# EAGLE board SIO2SD (EAGLE 7.2.0)
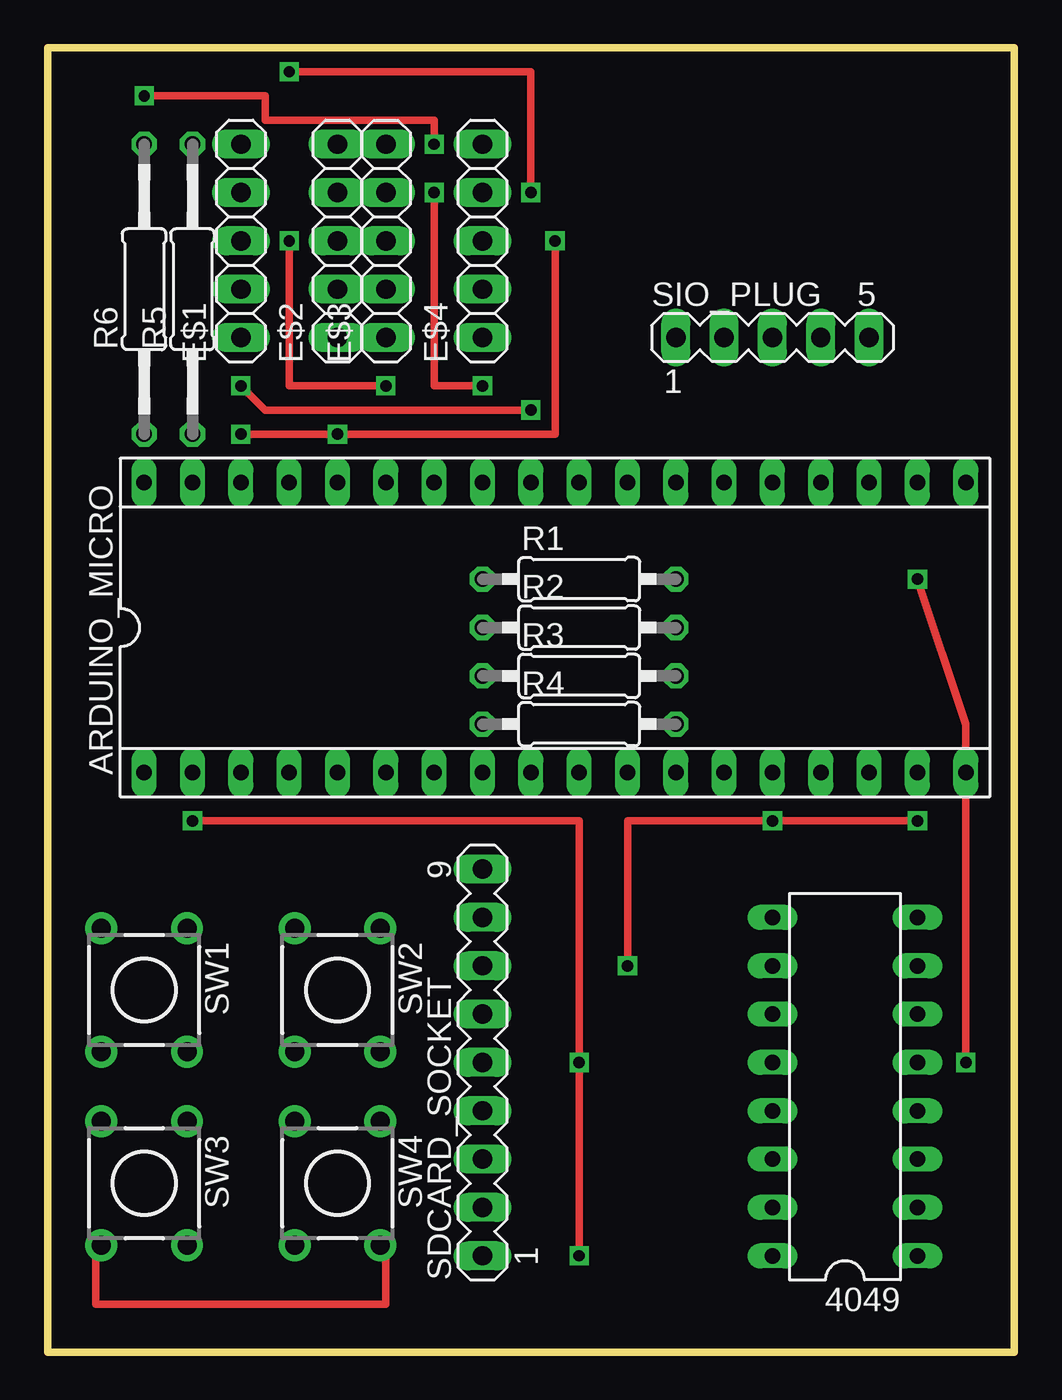
[diagram p0: board, top side]
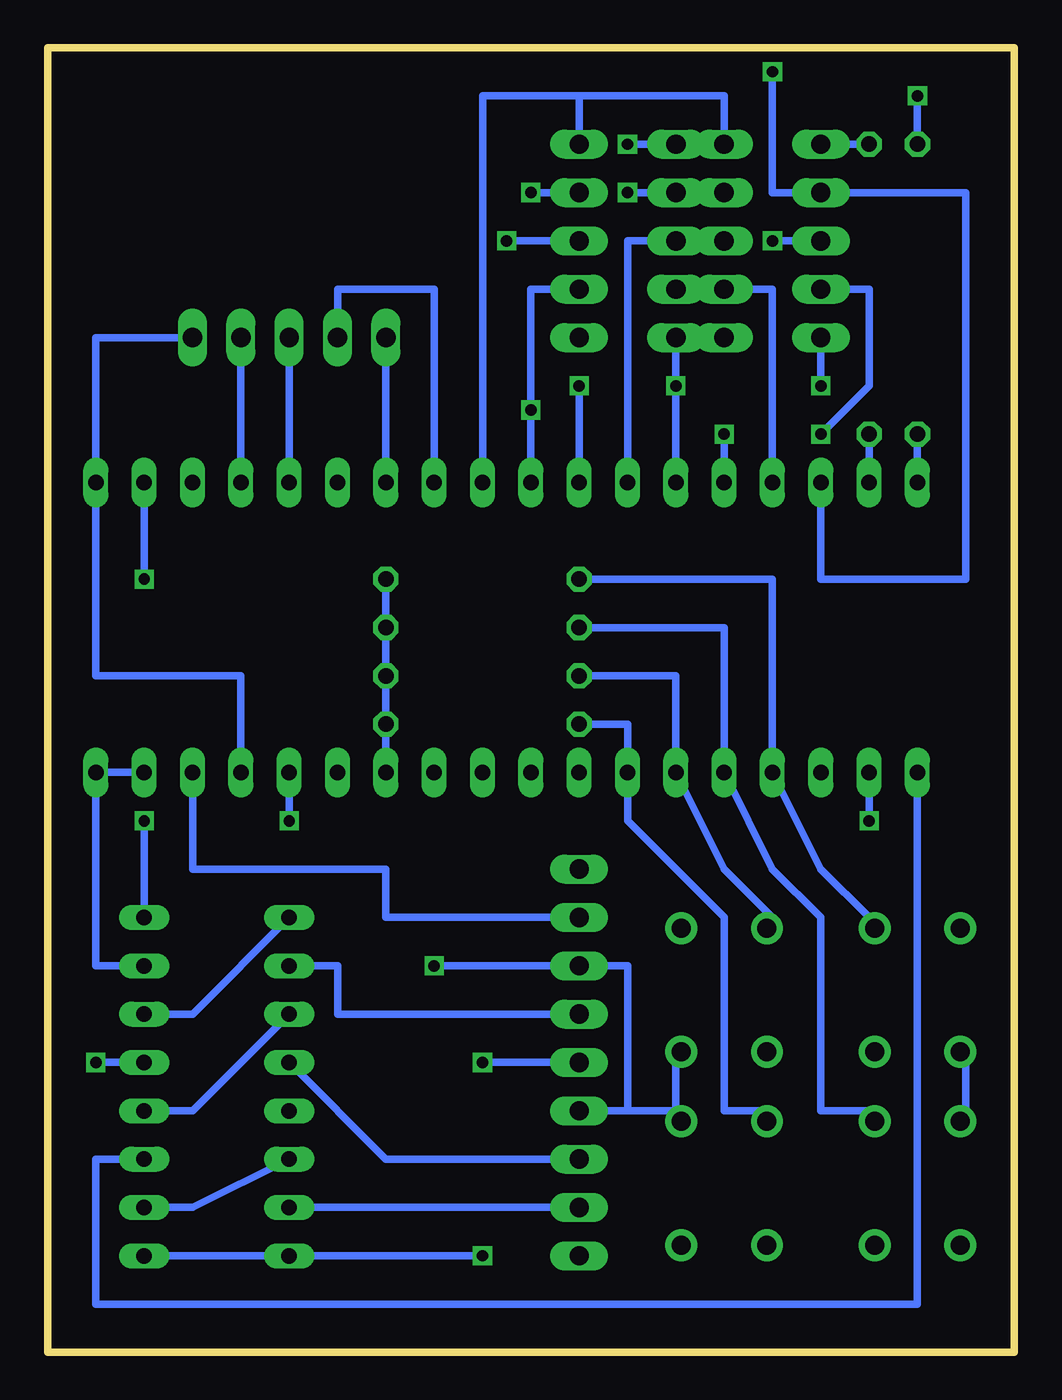
[diagram p1: board, bottom side, seen from below]

Size 50.8 x 68.58 mm. Coordinates in mm from the lower left corner, seen from the top.
Outline: 0,68.58 50.8,68.58 50.8,0 0,0 0,68.58
Copper layers (1*16): Top 0.035mm / dielectric 1.5mm / Bottom 0.035mm
Design rules "default": minimum track width 10mil, minimum drill 24mil, track to track 8mil, track to pad 8mil, pad to pad 8mil, via to via 8mil, smd to smd 8mil, copper to edge 40mil, drill to drill 8mil, minimum pad ring 10mil, minimum via ring 8mil, stop-mask expansion 4mil, vias tented up to drill 0mil, thermal gap 10mil

## Footprints (pad centres in the part's own frame; a part is rotated, then mirrored left to right if it is on the bottom)
DIL16 = drill 0.813 long: 1 -8.89,-3.81; 2 -6.35,-3.81; 3 -3.81,-3.81; 4 -1.27,-3.81; 5 1.27,-3.81; 6 3.81,-3.81; 7 6.35,-3.81; 8 8.89,-3.81; 9 8.89,3.81; 10 6.35,3.81; 11 3.81,3.81; 12 1.27,3.81; 13 -1.27,3.81; 14 -3.81,3.81; 15 -6.35,3.81; 16 -8.89,3.81
SOCKET-36 = drill 0.813 long: 1 -21.59,-7.62; 2 -19.05,-7.62; 3 -16.51,-7.62; 4 -13.97,-7.62; 5 -11.43,-7.62; 6 -8.89,-7.62; 7 -6.35,-7.62; 8 -3.81,-7.62; 9 -1.27,-7.62; 10 1.27,-7.62; 11 3.81,-7.62; 12 6.35,-7.62; 13 8.89,-7.62; 14 11.43,-7.62; 15 13.97,-7.62; 16 16.51,-7.62; 17 19.05,-7.62; 18 21.59,-7.62; 19 21.59,7.62; 20 19.05,7.62; 21 16.51,7.62; 22 13.97,7.62; 23 11.43,7.62; 24 8.89,7.62; 25 6.35,7.62; 26 3.81,7.62; 27 1.27,7.62; 28 -1.27,7.62; 29 -3.81,7.62; 30 -6.35,7.62; 31 -8.89,7.62; 32 -11.43,7.62; 33 -13.97,7.62; 34 -16.51,7.62; 35 -19.05,7.62; 36 -21.59,7.62
1X05 = drill 1.016 long: 1 -5.08,0; 2 -2.54,0; 3 0,0; 4 2.54,0; 5 5.08,0
0207/10 = drill 0.813 octagon: 1 -5.08,0; 2 5.08,0
0207/15 = drill 0.813 octagon: 1 -7.62,0; 2 7.62,0
MA09-1 = drill 1.016 long: 1 -10.16,0; 2 -7.62,0; 3 -5.08,0; 4 -2.54,0; 5 0,0; 6 2.54,0; 7 5.08,0; 8 7.62,0; 9 10.16,0
MA05-1 = drill 1.016 long: 1 -5.08,0; 2 -2.54,0; 3 0,0; 4 2.54,0; 5 5.08,0
TL1105 = drill 1 pad 1.676: 1 -2.25,3.25; 2 2.25,3.25; 3 -2.25,-3.25; 4 2.25,-3.25

## Placement (x,y rotation side)
4049  [DIL16]  41.91,13.97 90 top
ARDUINO_MICRO  [SOCKET-36]  26.67,38.1 0 top
E$1  [1X05]  10.16,58.42 90 top
E$2  [1X05]  15.24,58.42 90 top
E$3  [1X05]  17.78,58.42 90 top
E$4  [1X05]  22.86,58.42 90 top
R1  10K  [0207/10]  27.94,40.64 0 top
R2  10K  [0207/10]  27.94,38.1 0 top
R3  10K  [0207/10]  27.94,35.56 0 top
R4  10K  [0207/10]  27.94,33.02 0 top
R5  150  [0207/15]  7.62,55.88 90 top
R6  150  [0207/15]  5.08,55.88 90 top
SDCARD_SOCKET  [MA09-1]  22.86,15.24 90 top
SIO_PLUG  [MA05-1]  38.1,53.34 0 top
SW1  [TL1105]  5.08,19.05 180 top
SW2  [TL1105]  15.24,19.05 180 top
SW3  [TL1105]  5.08,8.89 180 top
SW4  [TL1105]  15.24,8.89 180 top

## Library data of the parts
4049 ARDUINO_MICRO = ic-package
E$1-E$4 = pinhead
R1-R6 = resistor
SDCARD_SOCKET SIO_PLUG = con-lstb
SW1-SW4 = switch

## Nets
3V: 4049.1 4049.16 ARDUINO_MICRO.2 SDCARD_SOCKET.5
5V: ARDUINO_MICRO.12 R1.2 R2.2 R3.2 R4.2
CLK: 4049.10 SDCARD_SOCKET.6
CMD: 4049.12 SDCARD_SOCKET.3
DAT3: 4049.15 SDCARD_SOCKET.2
DATA_IN: ARDUINO_MICRO.22 SIO_PLUG.4
DATA_OUT: ARDUINO_MICRO.23 SIO_PLUG.3
GND: 4049.8 ARDUINO_MICRO.14 SDCARD_SOCKET.4 SDCARD_SOCKET.7
MISO: ARDUINO_MICRO.16 SDCARD_SOCKET.8
MOSI: 4049.5 ARDUINO_MICRO.20
S$1: ARDUINO_MICRO.5 R2.1
S$3: 4049.6 4049.9
S$4: 4049.4 4049.11
S$5: 4049.2 4049.14
S$6: ARDUINO_MICRO.26 SIO_PLUG.2
S$7: ARDUINO_MICRO.25 SIO_PLUG.1
S$10: ARDUINO_MICRO.34 E$1.4 E$4.4
S$11: ARDUINO_MICRO.29 E$2.4 E$3.4
S$13: ARDUINO_MICRO.4 R1.1
S$15: ARDUINO_MICRO.31 E$1.3 E$3.1
S$16: ARDUINO_MICRO.7 R4.1
S$17: ARDUINO_MICRO.33 E$2.2 E$3.2
S$18: ARDUINO_MICRO.36 R6.1
S$19: ARDUINO_MICRO.27 E$2.5 E$4.5
S$20: ARDUINO_MICRO.28 E$1.1 E$4.2
S$21: ARDUINO_MICRO.30 E$2.3 E$3.3
S$22: ARDUINO_MICRO.35 R5.1
S$23: E$1.5 R5.2
S$24: E$3.5 R6.2
S$25: ARDUINO_MICRO.32 E$1.2 E$4.3
S$28: ARDUINO_MICRO.6 R3.1
SCK: 4049.7 ARDUINO_MICRO.17
SS: 4049.3 ARDUINO_MICRO.1
VIN: ARDUINO_MICRO.15 SIO_PLUG.5

## Tracks (layer width: path | path; a pad name or v marks a point on that pad's centre or on a via)
3V  (via drill 0.6)
  Top 0.406: v7.62,27.94 27.94,27.94 v27.94,15.24 v27.94,5.08
  Bottom 0.406: ARDUINO_MICRO.2 v7.62,27.94 | v27.94,15.24 SDCARD_SOCKET.5 | 4049.1 4049.16 v27.94,5.08
5V
  Bottom 0.406: R1.2 R2.2 R3.2 R4.2 ARDUINO_MICRO.12
CLK
  Bottom 0.406: 4049.10 35.56,20.32 35.56,17.78 SDCARD_SOCKET.6
CMD
  Bottom 0.406: SDCARD_SOCKET.3 33.02,10.16 4049.12
DAT3
  Bottom 0.406: SDCARD_SOCKET.2 4049.15
DATA_IN
  Bottom 0.406: ARDUINO_MICRO.22 SIO_PLUG.4
DATA_OUT
  Bottom 0.406: ARDUINO_MICRO.23 SIO_PLUG.3
GND  (via drill 0.6)
  Top 0.406: v30.48,20.32 30.48,27.94 v38.1,27.94 v45.72,27.94
  Bottom 0.406: v38.1,27.94 ARDUINO_MICRO.14 | v30.48,20.32 SDCARD_SOCKET.7 20.32,20.32 20.32,12.7 | v45.72,27.94 4049.8 | SDCARD_SOCKET.4 20.32,12.7 | 17.78,15.24 17.78,12.7 20.32,12.7
MISO
  Bottom 0.406: SDCARD_SOCKET.8 33.02,22.86 33.02,25.4 43.18,25.4 ARDUINO_MICRO.16
MOSI  (via drill 0.6)
  Top 0.406: v45.72,40.64 48.26,33.02 v48.26,15.24
  Bottom 0.406: ARDUINO_MICRO.20 v45.72,40.64 | v48.26,15.24 4049.5
S$1
  Bottom 0.406: R2.1 15.24,38.1 ARDUINO_MICRO.5 12.7,25.4 10.16,22.86 10.16,12.7 7.62,12.7
S$2
  Top 0.406: 17.78,5.08 17.78,2.54 2.54,2.54 2.54,5.08
S$3
  Bottom 0.406: 4049.6 43.18,17.78 4049.9
S$4
  Bottom 0.406: 4049.4 43.18,12.7 4049.11
S$5
  Bottom 0.406: 4049.2 43.18,7.62 4049.14
S$6
  Bottom 0.406: ARDUINO_MICRO.26 30.48,55.88 35.56,55.88 SIO_PLUG.2
S$7
  Bottom 0.406: ARDUINO_MICRO.25 SIO_PLUG.1
S$10  (via drill 0.6)
  Top 0.406: v25.4,60.96 25.4,67.31 v12.7,67.31
  Bottom 0.406: v25.4,60.96 E$4.4 | v12.7,67.31 12.7,60.96 E$1.4 2.54,60.96 2.54,40.64 10.16,40.64 ARDUINO_MICRO.34
S$11  (via drill 0.6)
  Top 0.406: v20.32,60.96 20.32,50.8 v22.86,50.8
  Bottom 0.406: v20.32,60.96 E$3.4 E$2.4 | v22.86,50.8 ARDUINO_MICRO.29
S$13
  Bottom 0.406: R1.1 12.7,40.64 ARDUINO_MICRO.4 10.16,25.4 7.62,22.86
S$15  (via drill 0.6)
  Top 0.406: v17.78,50.8 12.7,50.8 v12.7,58.42
  Bottom 0.406: E$3.1 v17.78,50.8 ARDUINO_MICRO.31 | v12.7,58.42 E$1.3
S$16
  Bottom 0.406: R4.1 20.32,33.02 ARDUINO_MICRO.7 20.32,27.94 15.24,22.86 15.24,12.7 12.7,12.7
S$17
  Bottom 0.406: E$2.2 E$3.2 12.7,55.88 ARDUINO_MICRO.33
S$18
  Bottom 0.406: R6.1 ARDUINO_MICRO.36
S$19
  Bottom 0.406: E$2.5 15.24,66.04 22.86,66.04 | 22.86,66.04 E$4.5 | 22.86,66.04 27.94,66.04 ARDUINO_MICRO.27
S$20  (via drill 0.6)
  Top 0.406: v10.16,50.8 11.43,49.53 v25.4,49.53
  Bottom 0.406: E$4.2 25.4,55.88 v25.4,49.53 ARDUINO_MICRO.28 | E$1.1 v10.16,50.8
S$21
  Bottom 0.406: E$2.3 E$3.3 20.32,58.42 ARDUINO_MICRO.30
S$22
  Bottom 0.406: R5.1 ARDUINO_MICRO.35
S$23
  Bottom 0.406: R5.2 E$1.5
S$24  (via drill 0.6)
  Top 0.406: v5.08,66.04 11.43,66.04 11.43,64.77 20.32,64.77 v20.32,63.5
  Bottom 0.406: R6.2 v5.08,66.04 | v20.32,63.5 E$3.5
S$25  (via drill 0.6)
  Top 0.406: v26.67,58.42 26.67,48.26 v15.24,48.26 v10.16,48.26
  Bottom 0.406: E$1.2 7.62,55.88 7.62,50.8 v10.16,48.26 | E$4.3 v26.67,58.42 | ARDUINO_MICRO.32 v15.24,48.26
S$26
  Bottom 0.406: 2.54,15.24 2.54,12.7
S$28
  Bottom 0.406: R3.1 17.78,35.56 ARDUINO_MICRO.6 15.24,25.4 12.7,22.86
SCK
  Bottom 0.406: ARDUINO_MICRO.17 48.26,30.48 48.26,20.32 4049.7
SS
  Bottom 0.406: 4049.3 48.26,10.16 48.26,2.54 5.08,2.54 ARDUINO_MICRO.1
VIN
  Bottom 0.406: ARDUINO_MICRO.15 40.64,35.56 48.26,35.56 48.26,53.34 SIO_PLUG.5